# EAGLE board Component Test PCB v1 (EAGLE 9.7.0)

No outline drawn. Coordinates in mm, seen from the top.
Copper layers (1*16): Top / Bottom
Stack-up Default Layer Stack: Top User Defined 0.035mm / Dielectric-1 User Defined 1.5mm / Bottom User Defined 0.035mm
Design rules "default": minimum track width 6mil, minimum drill 0.35mm, track to track 6mil, track to pad 6mil, pad to pad 6mil, via to via 6mil, smd to smd 6mil, copper to edge 40mil, drill to drill 6mil, minimum pad ring 10mil, minimum via ring 8mil, stop-mask expansion 4mil, vias tented up to drill 0mil, thermal gap 10mil

## Footprints (pad centres in the part's own frame; a part is rotated, then mirrored left to right if it is on the bottom)
2PINPOWERCONNECTOR = drill 1.27 pad 3.175 slot 1.524: P$1 -5.08,0.889; P$2 -10.16,0.889 | hole 2.54: -7.62,3.327 | hole 3.81: -3.81,12.344; -11.43,12.344

## Placement (x,y rotation side)
U$3  2PINPOWERCONNECTOR  [2PINPOWERCONNECTOR]  38.1,5.1 0 top

## Library data of the parts
U$3 = Robotics Team